# Altium PCB Hub.PcbDoc
Units mm, origin at the board's own origin, x right, y up, seen from the top; angles counter-clockwise.
Board outline 53 x 85 mm, 2 copper layers (Top Layer, Bottom Layer); 65 components, 44 nets, 177 pads, 18 vias.
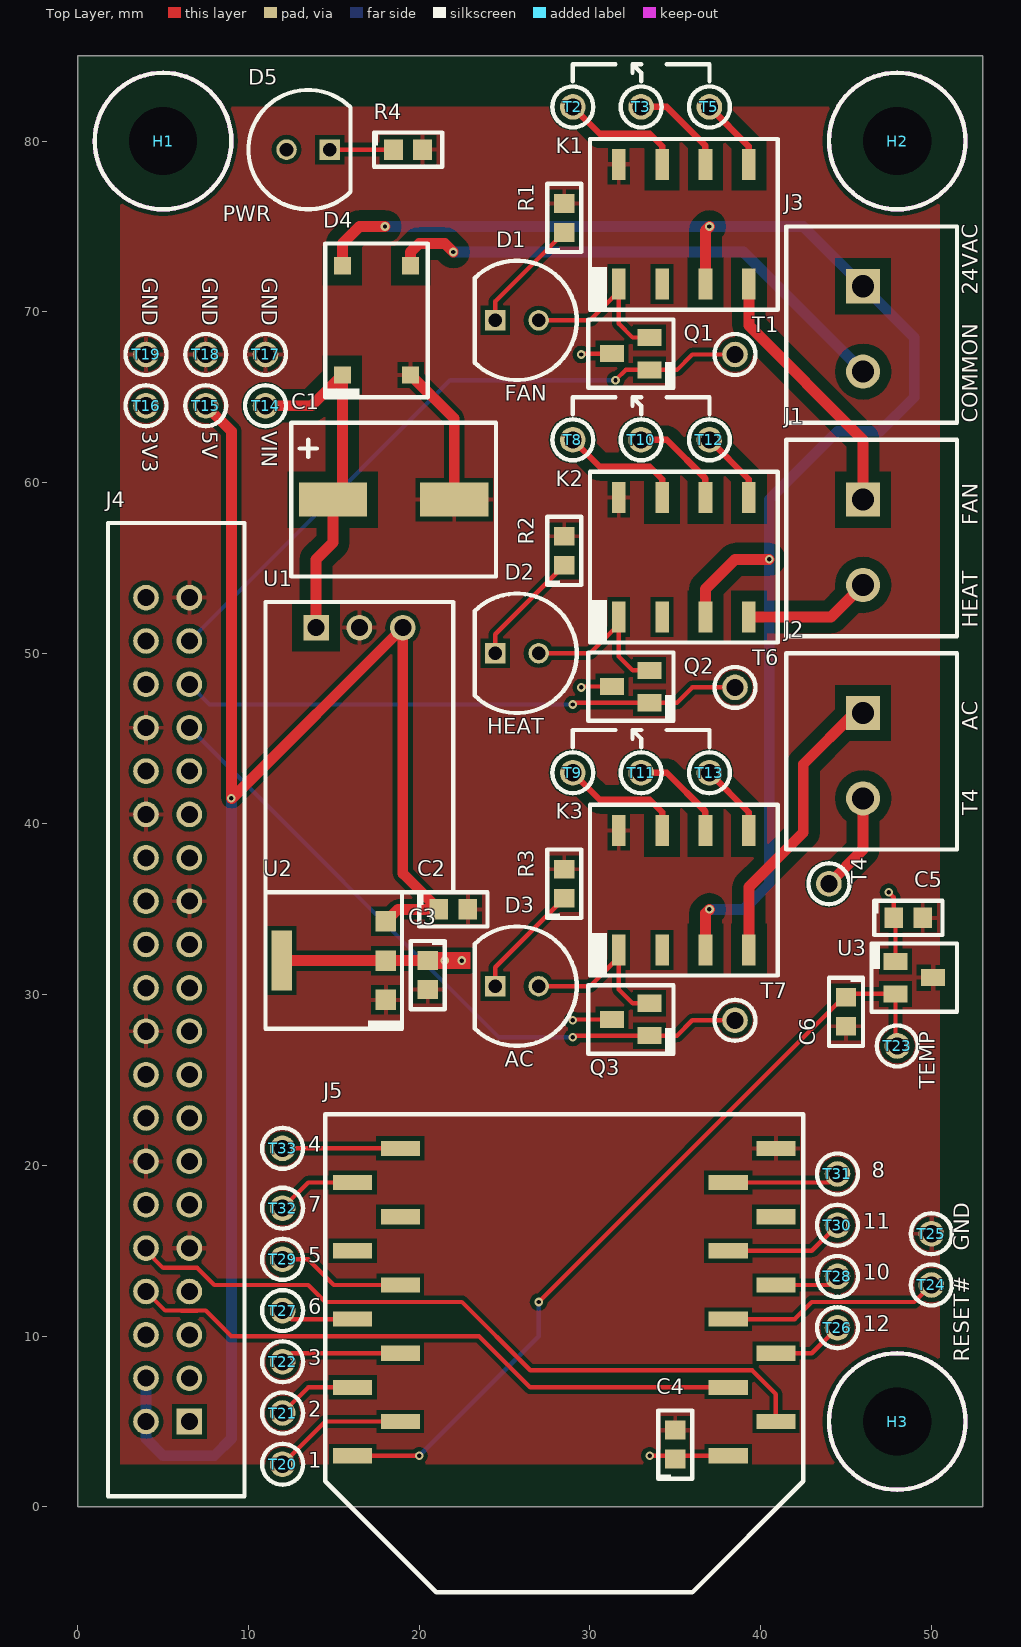
[diagram p0: Top Layer view]
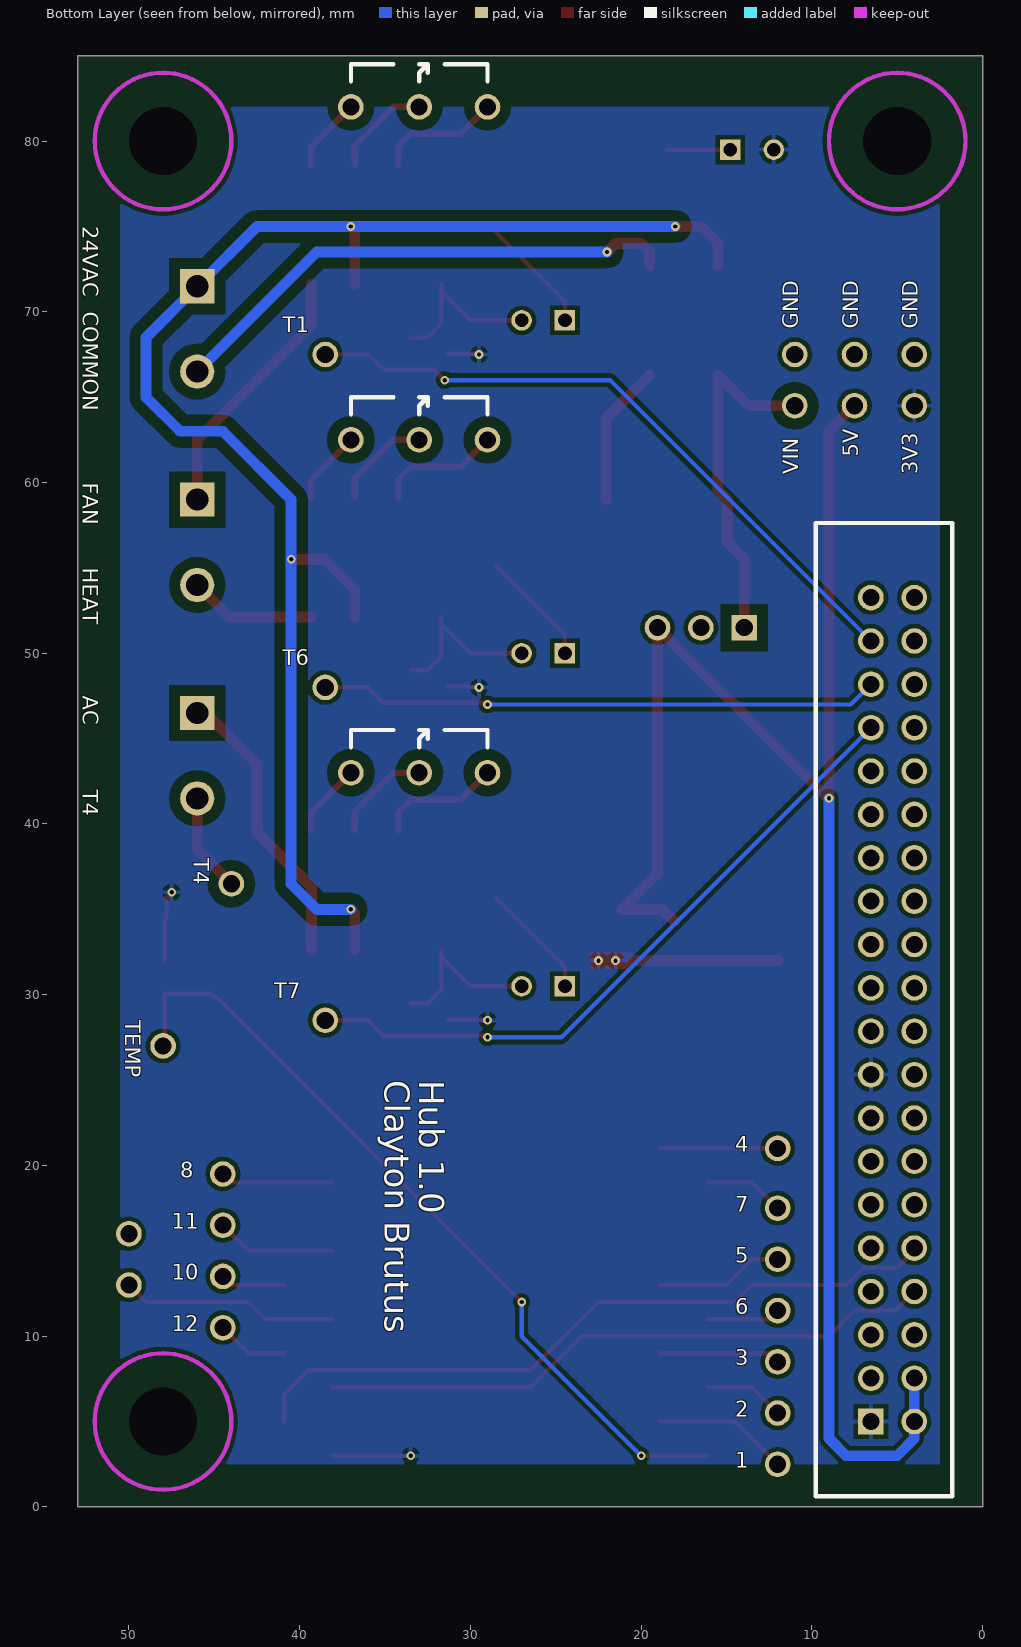
[diagram p1: Bottom Layer view, seen from below]

## Layer stack, top to bottom
Top Solder: solder mask 0.0102, Solder Resist, Dk 3.5
Top Layer: signal copper 0.0356
Dielectric 1: dielectric 0.32, FR-4, Dk 4.8
Bottom Layer: signal copper 0.0356
Bottom Solder: solder mask 0.0102, Solder Resist, Dk 3.5

## Board outline
0,0 53,0 53,85 0,85

## Design rules (kind name [scope] priority, off if disabled: settings)
Clearance "Schematic Clearance Constraint_16" [InNet('NetJ2_2')] p1: gap=0.635 ignorepadtopadclearanceinfootprint=FALSE except(0: Arc-Hole Track-Hole SMDPad-Hole THPad-Hole Via-Hole Fill-Hole Poly-Hole Region-Hole Text-Hole)
Clearance "Schematic Clearance Constraint_14" [InNet('VIN')] p2: gap=0.635 ignorepadtopadclearanceinfootprint=FALSE except(0: Arc-Hole Track-Hole SMDPad-Hole THPad-Hole Via-Hole Fill-Hole Poly-Hole Region-Hole Text-Hole)
Clearance "Schematic Clearance Constraint_13" [InNet('NetK1_6')] p3: gap=0.635 ignorepadtopadclearanceinfootprint=FALSE except(0: Arc-Hole Track-Hole SMDPad-Hole THPad-Hole Via-Hole Fill-Hole Poly-Hole Region-Hole Text-Hole)
Clearance "Schematic Clearance Constraint_12" [InNet('NetK2_6')] p4: gap=0.635 ignorepadtopadclearanceinfootprint=FALSE except(0: Arc-Hole Track-Hole SMDPad-Hole THPad-Hole Via-Hole Fill-Hole Poly-Hole Region-Hole Text-Hole)
Clearance "Schematic Clearance Constraint_11" [InNet('NetK1_7')] p5: gap=0.635 ignorepadtopadclearanceinfootprint=FALSE except(0: Arc-Hole Track-Hole SMDPad-Hole THPad-Hole Via-Hole Fill-Hole Poly-Hole Region-Hole Text-Hole)
Clearance "Schematic Clearance Constraint_10" [InNet('NetK1_5')] p6: gap=0.635 ignorepadtopadclearanceinfootprint=FALSE except(0: Arc-Hole Track-Hole SMDPad-Hole THPad-Hole Via-Hole Fill-Hole Poly-Hole Region-Hole Text-Hole)
Clearance "Schematic Clearance Constraint_9" [InNet('NetD4_3')] p7: gap=0.635 ignorepadtopadclearanceinfootprint=FALSE except(0: Arc-Hole Track-Hole SMDPad-Hole THPad-Hole Via-Hole Fill-Hole Poly-Hole Region-Hole Text-Hole)
Clearance "Schematic Clearance Constraint_8" [InNet('NetK2_5')] p8: gap=0.635 ignorepadtopadclearanceinfootprint=FALSE except(0: Arc-Hole Track-Hole SMDPad-Hole THPad-Hole Via-Hole Fill-Hole Poly-Hole Region-Hole Text-Hole)
Clearance "Schematic Clearance Constraint_7" [InNet('AC_OUT')] p9: gap=0.635 ignorepadtopadclearanceinfootprint=FALSE except(0: Arc-Hole Track-Hole SMDPad-Hole THPad-Hole Via-Hole Fill-Hole Poly-Hole Region-Hole Text-Hole)
Clearance "Schematic Clearance Constraint_6" [InNet('FAN_OUT')] p10: gap=0.635 ignorepadtopadclearanceinfootprint=FALSE except(0: Arc-Hole Track-Hole SMDPad-Hole THPad-Hole Via-Hole Fill-Hole Poly-Hole Region-Hole Text-Hole)
Clearance "Schematic Clearance Constraint_5" [InNet('HEAT_OUT')] p11: gap=0.635 ignorepadtopadclearanceinfootprint=FALSE except(0: Arc-Hole Track-Hole SMDPad-Hole THPad-Hole Via-Hole Fill-Hole Poly-Hole Region-Hole Text-Hole)
Clearance "Schematic Clearance Constraint_4" [InNet('NetK3_7')] p12: gap=0.635 ignorepadtopadclearanceinfootprint=FALSE except(0: Arc-Hole Track-Hole SMDPad-Hole THPad-Hole Via-Hole Fill-Hole Poly-Hole Region-Hole Text-Hole)
Clearance "Schematic Clearance Constraint_3" [InNet('NetK3_6')] p13: gap=0.635 ignorepadtopadclearanceinfootprint=FALSE except(0: Arc-Hole Track-Hole SMDPad-Hole THPad-Hole Via-Hole Fill-Hole Poly-Hole Region-Hole Text-Hole)
Clearance "Schematic Clearance Constraint_2" [InNet('NetK3_5')] p14: gap=0.635 ignorepadtopadclearanceinfootprint=FALSE except(0: Arc-Hole Track-Hole SMDPad-Hole THPad-Hole Via-Hole Fill-Hole Poly-Hole Region-Hole Text-Hole)
Clearance "Schematic Clearance Constraint_1" [InNet('NetK2_7')] p15: gap=0.635 ignorepadtopadclearanceinfootprint=FALSE except(0: Arc-Hole Track-Hole SMDPad-Hole THPad-Hole Via-Hole Fill-Hole Poly-Hole Region-Hole Text-Hole)
Clearance "Schematic Clearance Constraint" [InNet('24VAC')] p16: gap=0.635 ignorepadtopadclearanceinfootprint=FALSE except(0: Arc-Hole Track-Hole SMDPad-Hole THPad-Hole Via-Hole Fill-Hole Poly-Hole Region-Hole Text-Hole)
Clearance [All] p17: gap=0.254 ignorepadtopadclearanceinfootprint=FALSE except(0: Arc-Hole Track-Hole SMDPad-Hole THPad-Hole Via-Hole Fill-Hole Poly-Hole Region-Hole Text-Hole)
PolygonConnect [All] p1: connectstyle=Relief reliefconductorwidth=0.254 reliefentries=4 polygonreliefangle="90 Angle" airgapwidth=0.254
RoutingVias [All] p1: holewidth=0.711 width=1.27 viastyle="Through Hole" minholewidth=0.711 minwidth=1.27 maxholewidth=0.711 maxwidth=1.27
SolderMaskExpansion [All] p1: expansion=0.102
Width "Schematic Width Constraint_30" [InNet('AC_OUT')] p1: maxlimit=0.635 minlimit=0.381 preferedwidth=0.635 minimp=50.000000 maximp=50.000000 favimp=50.000000
Width "Schematic Width Constraint_29" [InNet('FAN_OUT')] p2: maxlimit=0.635 minlimit=0.381 preferedwidth=0.635 minimp=50.000000 maximp=50.000000 favimp=50.000000
Width "Schematic Width Constraint_14" [InNet('HEAT_OUT')] p3: maxlimit=0.635 minlimit=0.381 preferedwidth=0.635 minimp=50.000000 maximp=50.000000 favimp=50.000000
Width "Schematic Width Constraint_12" [InNet('NetK3_7')] p4: maxlimit=0.635 minlimit=0.381 preferedwidth=0.635 minimp=50.000000 maximp=50.000000 favimp=50.000000
Width "Schematic Width Constraint_10" [InNet('NetK3_6')] p5: maxlimit=0.635 minlimit=0.381 preferedwidth=0.635 minimp=50.000000 maximp=50.000000 favimp=50.000000
Width "Schematic Width Constraint_9" [InNet('NetK3_5')] p6: maxlimit=0.635 minlimit=0.381 preferedwidth=0.635 minimp=50.000000 maximp=50.000000 favimp=50.000000
Width "Schematic Width Constraint_8" [InNet('NetK2_7')] p7: maxlimit=0.635 minlimit=0.381 preferedwidth=0.635 minimp=50.000000 maximp=50.000000 favimp=50.000000
Width "Schematic Width Constraint_7" [InNet('NetK2_6')] p8: maxlimit=0.635 minlimit=0.381 preferedwidth=0.635 minimp=50.000000 maximp=50.000000 favimp=50.000000
Width "Schematic Width Constraint_6" [InNet('NetK2_5')] p9: maxlimit=0.635 minlimit=0.381 preferedwidth=0.635 minimp=50.000000 maximp=50.000000 favimp=50.000000
Width "Schematic Width Constraint_5" [InNet('NetK1_7')] p10: maxlimit=0.635 minlimit=0.381 preferedwidth=0.635 minimp=50.000000 maximp=50.000000 favimp=50.000000
Width "Schematic Width Constraint_4" [InNet('NetK1_6')] p11: maxlimit=0.635 minlimit=0.381 preferedwidth=0.635 minimp=50.000000 maximp=50.000000 favimp=50.000000
Width "Schematic Width Constraint_3" [InNet('NetK1_5')] p12: maxlimit=0.635 minlimit=0.381 preferedwidth=0.635 minimp=50.000000 maximp=50.000000 favimp=50.000000
Width "Schematic Width Constraint_2" [InNet('NetJ2_2')] p13: maxlimit=0.635 minlimit=0.381 preferedwidth=0.635 minimp=50.000000 maximp=50.000000 favimp=50.000000
Width "Schematic Width Constraint_1" [InNet('NetD4_3')] p14: maxlimit=0.635 minlimit=0.381 preferedwidth=0.635 minimp=50.000000 maximp=50.000000 favimp=50.000000
Width "Schematic Width Constraint" [InNet('VIN')] p15: maxlimit=0.635 minlimit=0.381 preferedwidth=0.635 minimp=50.000000 maximp=50.000000 favimp=50.000000
Width "Schematic Width Constraint_11" [InNet('24VAC')] p16: maxlimit=0.635 minlimit=0.381 preferedwidth=0.635 minimp=50.000000 maximp=50.000000 favimp=50.000000
Width [All] p17: maxlimit=0.635 minlimit=0.254 preferedwidth=0.254
30 further rules are at their usual default settings.

## Classes and differential pairs
component class Xbee: C4 C5 C6 J5 T20 T21 T22 T23 T24 T25 T26 T27 T28 T29 T30 T31 T32 T33 U3
component class Rpi: J4
component class Power: C1 C2 C3 D4 D5 H1 H2 H3 J3 R4 T14 T15 T16 T17 T18 T19 U1 U2
component class Control: D1 D2 D3 J1 J2 K1 K2 K3 Q1 Q2 Q3 R1 R2 R3 T1 T2 T3 T4 T5 T6 T7 T8 T9 T10 T11 T12 T13

## Components (designator, comment, footprint, x,y, rotation, side; value= is the part's Value field where it differs from the comment)
C1 "CAP" EEE-1HA101UP 18.5,59 r90 top value=100uF
C2 "*" 0603 22,35 r90 top value=.1uF
C3 "*" 0603 20.5,31.15 r0 top value=10uF
C4 "*" 0603 35,3.65 r180 top value=.1uF
C5 "*" 0603 48.65,34.5 r90 top value=.1uF
C6 "*" 0603 45,29 r0 top value=.1uF
D1 "D_LED_LED5MM" LED5MM 25.73,69.5 r0 top
D2 "D_LED_LED5MM" LED5MM 25.73,50 r0 top
D3 "D_LED_LED5MM" LED5MM 25.73,30.5 r0 top
D4 "D_RECTBRIDGE_ABS" ABS 17.5,69.5 r180 top
D5 "D_LED_LED5MM" LED5MM 13.5,79.5 r180 top
H1 "H_MOUNTHOLE_MOUNTHOLE4MM" MOUNTHOLE4MM 5,80 r0 top value=4mm
H2 "H_MOUNTHOLE_MOUNTHOLE4MM" MOUNTHOLE4MM 48,80 r0 top value=4mm
H3 "H_MOUNTHOLE_MOUNTHOLE4MM" MOUNTHOLE4MM 48,5 r0 top value=4mm
J1 "J_2POSTERM_1935161" 1935161 46,56.5 r270 top
J2 "J_2POSTERM_1935161" 1935161 46,44 r270 top
J3 "J_2POSTERM_1935161" 1935161 46,69 r270 top
J4 "J_RPI2B_ SFH11-PBPC-D20-ST-BK" SFH11-PBPC-D20-ST-BK 5.27,29.13 r180 top
J5 "J_XBEE_NPPN101BFLC-RC" NPPN101BFLC-RC 28.5,12 r180 top
K1 "K_G6K-2F_G6K-2F" G6K-2F 35.5,75.125 r0 top
K2 "K_G6K-2F_G6K-2F" G6K-2F 35.5,55.625 r0 top
K3 "K_G6K-2F_G6K-2F" G6K-2F 35.5,36.125 r0 top
Q1 "Q_NFET_SOT23" SOT23 32.4,67.55 r90 top
Q2 "Q_NFET_SOT23" SOT23 32.4,48.05 r90 top
Q3 "Q_NFET_SOT23" SOT23 32.4,28.55 r90 top
R1 "R_RES_0603" 0603 28.5,75.5 r180 top value=68
R2 "R_RES_0603" 0603 28.5,56 r180 top value=68
R3 "R_RES_0603" 0603 28.5,36.5 r180 top value=68
R4 "R_RES_0603" 0603 19.35,79.5 r90 top value=68
T1 "TESTPOINT" TESTPOINT1MM 38.5,67.5 r0 top value=1mm
T2 "TESTPOINT" TESTPOINT1MM 29,82 r90 top value=1mm
T3 "TESTPOINT" TESTPOINT1MM 33,82 r0 top value=1mm
T4 "TESTPOINT" TESTPOINT1MM 44,36.5 r90 top value=1mm
T5 "TESTPOINT" TESTPOINT1MM 37,82 r90 top value=1mm
T6 "TESTPOINT" TESTPOINT1MM 38.5,48 r0 top value=1mm
T7 "TESTPOINT" TESTPOINT1MM 38.5,28.5 r0 top value=1mm
T8 "TESTPOINT" TESTPOINT1MM 29,62.5 r90 top value=1mm
T9 "TESTPOINT" TESTPOINT1MM 29,43 r90 top value=1mm
T10 "TESTPOINT" TESTPOINT1MM 33,62.5 r90 top value=1mm
T11 "TESTPOINT" TESTPOINT1MM 33,43 r90 top value=1mm
T12 "TESTPOINT" TESTPOINT1MM 37,62.5 r90 top value=1mm
T13 "TESTPOINT" TESTPOINT1MM 37,43 r90 top value=1mm
T14 "TESTPOINT" TESTPOINT1MM 11,64.5 r0 top value=1mm
T15 "TESTPOINT" TESTPOINT1MM 7.5,64.5 r0 top value=1mm
T16 "TESTPOINT" TESTPOINT1MM 4,64.5 r0 top value=1mm
T17 "TESTPOINT" TESTPOINT1MM 11,67.5 r0 top value=1mm
T18 "TESTPOINT" TESTPOINT1MM 7.5,67.5 r0 top value=1mm
T19 "TESTPOINT" TESTPOINT1MM 4,67.5 r0 top value=1mm
T20 "TESTPOINT" TESTPOINT1MM 12,2.5 r0 top value=1mm
T21 "TESTPOINT" TESTPOINT1MM 12,5.5 r0 top value=1mm
T22 "TESTPOINT" TESTPOINT1MM 12,8.5 r0 top value=1mm
T23 "TESTPOINT" TESTPOINT1MM 48,27 r0 top value=1mm
T24 "TESTPOINT" TESTPOINT1MM 50,13 r90 top value=1mm
T25 "TESTPOINT" TESTPOINT1MM 50,16 r90 top value=1mm
T26 "TESTPOINT" TESTPOINT1MM 44.5,10.5 r0 top value=1mm
T27 "TESTPOINT" TESTPOINT1MM 12,11.5 r0 top value=1mm
T28 "TESTPOINT" TESTPOINT1MM 44.5,13.5 r0 top value=1mm
T29 "TESTPOINT" TESTPOINT1MM 12,14.5 r0 top value=1mm
T30 "TESTPOINT" TESTPOINT1MM 44.5,16.5 r0 top value=1mm
T31 "TESTPOINT" TESTPOINT1MM 44.5,19.5 r0 top value=1mm
T32 "TESTPOINT" TESTPOINT1MM 12,17.5 r0 top value=1mm
T33 "TESTPOINT" TESTPOINT1MM 12,21 r0 top value=1mm
U1 "U_OKI-78SR-5/1.5-W36H-C_OKI-78SR-5/1.5-W36H-C" OKI-78SR-5/1.5-W36H-C 16.5,51.5 r180 top
U2 "U_LD1117S33TR_SOT223" SOT223 15,32 r90 top value=3.3V
U3 "U_TEMPSENSE-AN_SOT23" SOT23 49,31 r270 top

## Footprints (in the part's own frame and the unit in brackets; to place one, negate y for a bottom-side part, rotate by r counter-clockwise, add the part's x,y. Pads: shape width x height; smd on the part's side, far side on the other; paste and mask are expansions set on the pad)
0603 [mm]
  rect 1.2x1.1 smd: 1(0,0.85) 2(0,-0.85)
  silkscreen extent -1,-2 1,2, body extent -0.43,-0.77 0.43,0.78, height 0.44
1935161 [mm]
  rect 2x2 hole 1.3: 1(-2.5,0)
  round 2 hole 1.3: 2(2.5,0)
  silkscreen extent -6,-4.5 5.5,5.5, body extent -5.58,-4 4.98,5, height 11.4
ABS [mm]
  rect 1x1 smd: 1(2,3.2) 2(-2,3.2) 3(-2,-3.2) 4(2,-3.2)
  silkscreen extent -3,-4.5 3,4.5, body extent -2.5,-3.06 2.5,3.06, height 1.42
EEE-1HA101UP [mm]
  rect 2x4 smd: 1(0,3.55) 2(0,-3.55)
  silkscreen extent -4.5,-6 4.5,6, body extent -4.15,-4.95 4.15,4.95, height 10.21
G6K-2F [mm]
  rect 0.8x1.8 smd: 1(-3.81,-3.5) 2(-1.27,-3.5) 3(1.27,-3.5) 4(3.81,-3.5) 5(3.81,3.5) 6(1.27,3.5) 7(-1.27,3.5) 8(-3.81,3.5)
  silkscreen extent -5.5,-5 5.5,5, body extent -5,-3.9 5,3.9, height 5.2
LED5MM [mm]
  rect 1.2x1.2 hole 0.8: 1(-1.27,0)
  round 1.2 hole 0.8: 2(1.27,0)
  silkscreen extent -2.47,-3.5 3.5,3.5, body extent -2.58,-2.95 2.87,2.95, height 13.6
MOUNTHOLE4MM [mm]
  round 0 hole 4 unplated: ""(0,0)
  Keep-Out Layer circle w0.254: c0,0 r4
  silkscreen extent -4,-4 4,4
NPPN101BFLC-RC [mm]
  rect 2.29x0.89 smd: 1(-9.605,9) 2(-12.395,7) 3(-9.605,5) 4(-12.395,3) 5(-9.605,1) 6(-12.395,-1) 7(-9.605,-3) 8(-12.395,-5) 9(-9.605,-7) 10(-12.395,-9) 11(9.605,-9) 12(12.395,-7) 13(9.605,-5) 14(12.395,-3) 15(9.605,-1) 16(12.395,1) 17(9.605,3) 18(12.395,5) 19(9.605,7) 20(12.395,9)
  silkscreen extent -14,-11 14,17, body extent -13,-10.25 13,10.25
OKI-78SR-5/1.5-W36H-C [mm]
  rect 1.5x1.5 hole 1: 1(2.54,0)
  round 1.5 hole 1: 2(0,0) 3(-2.54,0)
  silkscreen extent -5.5,-1.5 5.5,15.5, body extent -5.21,-1.25 5.21,15.26, height 8.25
SFH11-PBPC-D20-ST-BK [mm]
  rect 1.5x1.5 hole 1: 1(-1.27,24.13)
  round 1.5 hole 1: 2(1.27,24.13) 3(-1.27,21.59) 4(1.27,21.59) 5(-1.27,19.05) 6(1.27,19.05) 7(-1.27,16.51) 8(1.27,16.51) 9(-1.27,13.97) 10(1.27,13.97) 11(-1.27,11.43) 12(1.27,11.43) 13(-1.27,8.89) 14(1.27,8.89) 15(-1.27,6.35) 16(1.27,6.35) 17(-1.27,3.81) 18(1.27,3.81) 19(-1.27,1.27) 20(1.27,1.27) 21(-1.27,-1.27) 22(1.27,-1.27) 23(-1.27,-3.81) 24(1.27,-3.81) 25(-1.27,-6.35) 26(1.27,-6.35) 27(-1.27,-8.89) 28(1.27,-8.89) 29(-1.27,-11.43) 30(1.27,-11.43) 31(-1.27,-13.97) 32(1.27,-13.97) 33(-1.27,-16.51) 34(1.27,-16.51) 35(-1.27,-19.05) 36(1.27,-19.05) 37(-1.27,-21.59) 38(1.27,-21.59) 39(-1.27,-24.13) 40(1.27,-24.13)
  silkscreen extent -4.5,-28.5 3.5,28.5, body extent -4,-27.94 3,27.94, height 2.76
SOT23 [mm]
  rect 1x1.4 smd: 1(-0.95,-1.1) 2(0.95,-1.1) 3(0,1.1)
  silkscreen extent -2,-2.5 2,2.5, body extent -1.5,-1.2 1.5,1.2, height 1.1
SOT223 [mm]
  rect 1.2x1.2 smd: 1(-2.3,-3.05) 2(0,-3.05) 3(2.3,-3.05)
  rect 3.5x1.2 smd: 4(0,3.05)
  silkscreen extent -4,-4 4,4, body extent -3.25,-3.45 3.25,3.45
TESTPOINT1MM [mm]
  round 1.5 hole 1: 1(0,0)
  silkscreen extent -1.2,-1.2 1.2,1.2

## Part data
C1: library part C_CAP-P_EEE-1HA101UP, Manufacturer="Panasonic Electronic Components", PartNumber=EEE-1HA101UP, Rating=50V
C2 C4 C5 C6: library part C_CAP_0603, Manufacturer=KEMET, PartNumber=C0603C104K5RACAUTO, Rating=50V
C3: library part C_CAP_0603, Manufacturer="Taiyo Yuden", PartNumber=JMK107ABJ106MA-T, Rating=6.3V
D4: Manufacturer="SMC Diode Solutions", PartNumber=ABS10TR, Rating=1A
J1 J2 J3: Manufacturer="Phoenix Contact", PartNumber=1935161, Rating=17.5A
J4: Manufacturer="Sullins Connector Solutions", PartNumber=SFH11-PBPC-D20-ST-BK, Rating=3A
J5: Manufacturer="Sullins Connector Solutions", PartNumber=NPPN101BFLC-RC, Rating=1A
K1 K2 K3: Manufacturer=Omron, PartNumber=G6K-2F-DC3, Rating=1A
Q1 Q2 Q3: Manufacturer="On Semiconductor", PartNumber=BSS138, Rating=220mA
R1 R2 R3 R4: Manufacturer=Yageo, PartNumber=RC0603FR-0768RL, Rating=1/10W
T1 T2 T3 T4 T5 T6 T7 T8 T9 T10 T11 T12 T13 T14 T15 T16 T17 T18 T19 T20 T21 T22 T23 T24 T25 T26 T27 T28 T29 T30 T31 T32 T33: library part T_TESTPOINT_TESTPOINT1MM
U1: Manufacturer="Murata Power Solutions Inc.", PartNumber=OKI-78SR-5/1.5-W36H-C, Rating=1.5A
U2: Manufacturer=STM, PartNumber=LD1117S33TR, Rating=800mA
U3: Manufacturer=Microchip, PartNumber=MCP9700T-E/TT

## Via types
v1: diameter 0.508, hole 0.254, Top Layer to Bottom Layer, 18 vias

## Nets (pads, with @x,y where several pads share a name; then routed paths per layer and width w, separated by ;. In a path a pad name is that pad's centre, name@x,y a point inside that pad or via, vN(x,y) a via of type N, cw(c..) or ccw(c..) an arc to the next point about the centre after c; other vN are vias at no path point)
3V3: C3.1 C4.1 C5.1 D5.2 J4.1 J4.17 J5.1 Q1.3 Q2.3 Q3.3 T16.1 U2.2 U2.4 U3.1 | length 23.6
  Top Layer w0.254: D5.2@12,79.5 D5.2 ; v1(29,28.5) 29.05,28.55 Q3.3 ; v1(29.5,48) 29.55,48.05 Q2.3 ; v1(29.5,67.5) 29.55,67.55 Q1.3 ; v1(33.5,3) J5.1 ; v1(47.5,36) 47.8,35.7 C5.1 47.9,34.4 U3.1
  Top Layer w0.635: U2.4 U2.2 C3.1
  other v1: 21.5,32 22.5,32
5V: C2.1 J4.2 J4.4 T15.1 U1.3 U2.3 | length 105.4
  Top Layer w0.635: T15.1 9,63 v1(9,41.5) 9.04,41.5 U1.3 19.04,37.11 C2.1 18.75,35 U2.3
  Bottom Layer w0.635: J4.4 J4.2 4,4 5,3 8,3 9,4 v1(9,41.5)
24VAC: D4.4 J3.1 K1.3 K2.3 K3.3 | length 91
  Top Layer w0.635: D4.4 15.5,74 16.5,75 v1(18,75) ; K3.3 36.77,34.77 v1(37,35) ; K2.3 36.77,53.77 38.5,55.5 v1(40.5,55.5) ; K1.3 36.77,74.77 v1(37,75)
  Bottom Layer w0.635: v1(18,75) v1(37,75) 42.5,75 J3.1 49,68.5 49,65 47,63 44.5,63 40.5,59 v1(40.5,55.5) 40.5,36.5 39,35 v1(37,35)
AC_CTRL: J4.33 Q3.1 T7.1 | length 39.9
  Top Layer w0.254: v1(29,27.5) 29.1,27.6 Q3.1 35.1,27.6 36,28.5 T7.1
  Bottom Layer w0.254: J4.33 24.68,27.5 v1(29,27.5)
AC_OUT: J2.1 K3.4 | length 16.9
  Top Layer w0.635: K3.4 39.31,36.31 42.5,39.5 42.5,43.5 45.5,46.5 J2.1
FAN_CTRL: J4.37 Q1.1 T1.1 | length 38.9
  Top Layer w0.254: v1(31.5,66) 32.1,66.6 Q1.1 35.1,66.6 36,67.5 T1.1
  Bottom Layer w0.254: J4.37 21.82,66 v1(31.5,66)
FAN_OUT: J1.1 K1.4 | length 15.4
  Top Layer w0.635: K1.4 39.31,69.19 46,62.5 J1.1
GND: C1.2 C2.2 C3.2 C4.2 C5.2 C6.2 D4.2 J4.9 J4.14 J4.20 J4.25 J4.30 J4.34 J4.39 J5.10 K1.8 K2.8 K3.8 R1.2 R2.2 R3.2 R4.2 T17.1 T18.1 T19.1 T25.1 U1.2 U2.1 U3.3 | length 8.4
  Top Layer w0.635: D4.2 22.05,63.75 C1.2
HEAT_CTRL: J4.35 Q2.1 T6.1 | length 32.9
  Top Layer w0.254: v1(29,47) 29.1,47.1 Q2.1 35.1,47.1 36,48 T6.1
  Bottom Layer w0.254: J4.35 7.72,47 v1(29,47)
HEAT_OUT: J1.2 K2.4 | length 7.5
  Top Layer w0.635: K2.4 44.125,52.125 J1.2
NetD1_1: D1.1 R1.1 | length 6.8
  Top Layer w0.254: D1.1 24.46,70.61 R1.1
NetD1_2: D1.2 K1.1 Q1.2 | length 9.9
  Top Layer w0.254: D1.2 30,69.5 K1.1@31.69,71.19 ; K1.1 K1.1@31.69,71.19 ; Q1.2 32.5,68.5 31.69,69.31 K1.1@31.69,71.19
NetD2_1: D2.1 R2.1 | length 6.8
  Top Layer w0.254: D2.1 24.46,51.11 R2.1
NetD2_2: D2.2 K2.1 Q2.2 | length 9.9
  Top Layer w0.254: D2.2 30,50 K2.1@31.69,51.69 ; K2.1 K2.1@31.69,51.69 ; Q2.2 32.5,49 31.69,49.81 K2.1@31.69,51.69
NetD3_1: D3.1 R3.1 | length 6.8
  Top Layer w0.254: D3.1 24.46,31.61 R3.1
NetD3_2: D3.2 K3.1 Q3.2 | length 9.9
  Top Layer w0.254: D3.2 30,30.5 K3.1@31.69,32.19 ; K3.1 K3.1@31.69,32.19 ; Q3.2 32.5,29.5 31.69,30.31 K3.1@31.69,32.19
NetD4_3: D4.3 J3.2 | length 30.6
  Top Layer w0.635: D4.3 19.5,73.5 20,74 21.5,74 v1(22,73.5)
  Bottom Layer w0.635: v1(22,73.5) 39,73.5 J3.2
NetD5_1: D5.1 R4.1 | length 3.7
  Top Layer w0.254: D5.1 R4.1
NetJ2_2: J2.2 T4.1 | length 5.8
  Top Layer w0.635: T4.1 46,38.5 J2.2
NetK1_5: K1.5 T5.1 | length 4.3
  Top Layer w0.381: T5.1 39.31,79.69 K1.5
NetK1_6: K1.6 T3.1 | length 5.8
  Top Layer w0.381: T3.1 34.5,82 36.77,79.73 K1.6
NetK1_7: K1.7 T2.1 | length 7.3
  Top Layer w0.381: T2.1 30.576,80.425 33.5,80.425 34.23,79.694 K1.7
NetK2_5: K2.5 T12.1 | length 4.3
  Top Layer w0.381: T12.1 39.31,60.19 K2.5
NetK2_6: K2.6 T10.1 | length 5.8
  Top Layer w0.381: T10.1 34.5,62.5 36.77,60.23 K2.6
NetK2_7: K2.7 T8.1 | length 7.3
  Top Layer w0.381: T8.1 30.576,60.925 33.5,60.925 34.23,60.194 K2.7
NetK3_5: K3.5 T13.1 | length 4.3
  Top Layer w0.381: T13.1 39.31,40.69 K3.5
NetK3_6: K3.6 T11.1 | length 5.8
  Top Layer w0.381: T11.1 34.5,43 36.77,40.73 K3.6
NetK3_7: K3.7 T9.1 | length 7.3
  Top Layer w0.381: T9.1 30.576,41.424 33.5,41.424 34.23,40.694 K3.7
TEMP_SENSE: C6.1 J5.20 T23.1 U3.2 | length 47.3
  Top Layer w0.254: J5.20 v1(20,3) ; v1(27,12) 44.85,29.85 C6.1 45.2,30.05 U3.2 47.9,27.1 T23.1
  Bottom Layer w0.254: v1(20,3) 27,10 v1(27,12)
VIN: C1.1 D4.1 T14.1 U1.1 | length 20.7
  Top Layer w0.635: T14.1 13.7,64.5 D4.1 15.5,59.55 C1.1 14.95,56.49 13.96,55.5 U1.1
XB_DIO1: J5.19 T20.1 | length 7.9
  Top Layer w0.254: T20.1 14.5,5 J5.19
XB_DIO2: J5.18 T21.1 | length 4.7
  Top Layer w0.254: T21.1 13.5,7 J5.18
XB_DIO3: J5.17 T22.1 | length 7.1
  Top Layer w0.254: T22.1 12.5,9 J5.17
XB_DIO4: J5.11 T33.1 | length 6.9
  Top Layer w0.254: T33.1 J5.11
XB_DIO5: J5.15 T29.1 | length 7.5
  Top Layer w0.254: T29.1 13.5,14.5 15,13 J5.15
XB_DIO6: J5.16 T27.1 | length 4.3
  Top Layer w0.254: T27.1 12.5,11 J5.16
XB_DIO7: J5.12 T32.1 | length 4.7
  Top Layer w0.254: T32.1 13.5,19 J5.12
XB_DIO8: J5.9 T31.1 | length 6.6
  Top Layer w0.254: J5.9 44,19 T31.1
XB_DIO10: J5.6 T28.1 | length 3.8
  Top Layer w0.254: J5.6 44,13 T28.1
XB_DIO11: J5.7 T30.1 | length 7
  Top Layer w0.254: J5.7 43,15 T30.1
XB_DIO12: J5.4 T26.1 | length 4.2
  Top Layer w0.254: J5.4 43,9 T26.1
XB_RESET#: J5.5 T24.1 | length 12.7
  Top Layer w0.254: J5.5 42,11 43,12 49,12 T24.1
XB_RX: J4.8 J5.3 | length 36.4
  Top Layer w0.254: J4.8 5.12,11.5 6.061,11.5 6.072,11.489 7.008,11.489 7.019,11.5 7.5,11.5 9,10 23.5,10 26.5,7 J5.3
XB_TX: J4.10 J5.2 | length 42.1
  Top Layer w0.254: J4.10 4,15 5,14 7,14 8,13 13.5,13 14.5,12 22.5,12 26.5,8 39.5,8 40.895,6.605 J5.2
pads on no net: H1. H2. H3. J4.3 J4.5 J4.6 J4.7 J4.11 J4.12 J4.13 J4.15 J4.16 J4.18 J4.19 J4.21 J4.22 J4.23 J4.24 J4.26 J4.27 J4.28 J4.29 J4.31 J4.32 J4.36 J4.38 J4.40 J5.8 J5.13 J5.14 K1.2 K2.2 K3.2

## Polygon pours and split planes (outlines as drawn)
GND on Top Layer "Top Layer-GND" (solid, remove dead copper, pour order 2): 2.5,2.5 2.5,82 50.5,82 50.5,2.5
3V3 on Bottom Layer "Bottom Layer-3V3" (solid, remove dead copper, pour order 4): 2.5,2.5 2.5,82 50.5,82 50.5,2.5

## Other copper
Top Layer:
  rectangle net 3V3: 20.5,31.5 23,32.5

## Silkscreen, mask and mechanical layers (free items; w line width, h text height)
Top Overlay:
  lines w0.25: 29,44.5 29,45 29,45.5 31.5,45.5 ; 29,64 29,64.5 29,65 31.5,65 ; 29,83.5 29,84 29,84.5 31.5,84.5 ; 32.5,45 32.5,45.5 ; 32.5,64.5 32.5,65 ; 32.5,84 32.5,84.5 ; 33,44.5 33,45 32.5,45.5 ; 33,45.5 32.5,45.5 ; 33,64 33,64.5 32.5,65 ; 33,65 32.5,65 ; 33,83.5 33,84 32.5,84.5 ; 33,84.5 32.5,84.5 ; 34.5,45.5 37,45.5 37,45 37,44.5 ; 34.5,65 37,65 37,64.5 37,64 ; 34.5,84.5 37,84.5 37,84 37,83.5 ; 32.5,45.5 32.5,45.5
  text "PWR" at 8.5,75 h1.52
  text "GND" at 3.5,72 h1.52 r270
  text "GND" at 7,72 h1.52 r270
  text "GND" at 10.5,72 h1.52 r270
  text "24VAC" at 53,71 h1.52 r90
  text "FAN" at 25,64.5 h1.52
  text "COMMON" at 53,63.5 h1.52 r90
  text "3V3" at 3.5,63 h1.52 r270
  text "5V" at 7,63 h1.52 r270
  text "VIN" at 10.5,63 h1.52 r270
  text "FAN" at 53,57.5 h1.52 r90
  text "HEAT" at 53,51.5 h1.52 r90
  text "AC" at 53,45.5 h1.52 r90
  text "HEAT" at 24,45 h1.52
  text "T4" at 53,40.5 h1.52 r90
  text "AC" at 25,25.5 h1.52
  text "TEMP" at 50.5,24.5 h1.52 r90
  text "4" at 13.5,20.5 h1.52
  text "8" at 46.5,19 h1.52
  text "7" at 13.5,17 h1.52
  text "11" at 46,16 h1.52
  text "GND" at 52.5,15 h1.52 r90
  text "5" at 13.5,14 h1.52
  text "10" at 46,13 h1.52
  text "6" at 13.5,11 h1.52
  text "12" at 46,10 h1.52
  text "RESET#" at 52.5,8.5 h1.52 r90
  text "3" at 13.5,8 h1.52
  text "2" at 13.5,5 h1.52
  text "1" at 13.5,2 h1.52
Bottom Overlay:
  lines w0.25: 29,44.5 29,45 29,45.5 31.5,45.5 ; 29,64 29,64.5 29,65 31.5,65 ; 29,83.5 29,84 29,84.5 31.5,84.5 ; 32.5,45 32.5,45.5 ; 32.5,64.5 32.5,65 ; 32.5,84 32.5,84.5 ; 33,44.5 33,45 32.5,45.5 ; 33,45.5 32.5,45.5 ; 33,64 33,64.5 32.5,65 ; 33,65 32.5,65 ; 33,83.5 33,84 32.5,84.5 ; 33,84.5 32.5,84.5 ; 34.5,45.5 37,45.5 37,45 37,44.5 ; 34.5,65 37,65 37,64.5 37,64 ; 34.5,84.5 37,84.5 37,84 37,83.5
  text "24VAC" at 53,75 h1.52 r90
  text "COMMON" at 53,70 h1.52 r90
  text "GND" at 3.5,69 h1.52 r270
  text "GND" at 7,69 h1.52 r270
  text "GND" at 10.5,69 h1.52 r270
  text "T1" at 41,68.5 h1.52
  text "5V" at 7,61.5 h1.52 r270
  text "3V3" at 3.5,60.5 h1.52 r270
  text "VIN" at 10.5,60.5 h1.52 r270
  text "FAN" at 53,60 h1.52 r90
  text "HEAT" at 53,55 h1.52 r90
  text "T6" at 41,49 h1.52
  text "AC" at 53,47.5 h1.52 r90
  text "T4" at 53,42 h1.52 r90
  text "T4" at 46.5,38 h1.52 r90
  text "T7" at 41.5,29.5 h1.52
  text "TEMP" at 50.5,28.5 h1.52 r90
  text "Hub 1.0" at 33.5,25 h2.5 r90
  text "Clayton Brutus" at 35.5,25 h2.5 r90
  text "4" at 14.5,20.5 h1.52
  text "8" at 47,19 h1.52
  text "7" at 14.5,17 h1.52
  text "11" at 47.5,16 h1.52
  text "5" at 14.5,14 h1.52
  text "10" at 47.5,13 h1.52
  text "6" at 14.5,11 h1.52
  text "12" at 47.5,10 h1.52
  text "3" at 14.5,8 h1.52
  text "2" at 14.5,5 h1.52
  text "1" at 14.5,2 h1.52